# Altium PCB cpld.PcbDoc
Units mm, origin at the board's own origin, x right, y up, seen from the top; angles counter-clockwise.
Board outline 99 x 88 mm, 2 copper layers (Top Layer, Bottom Layer); 34 components, 48 nets, 164 pads, 0 vias.
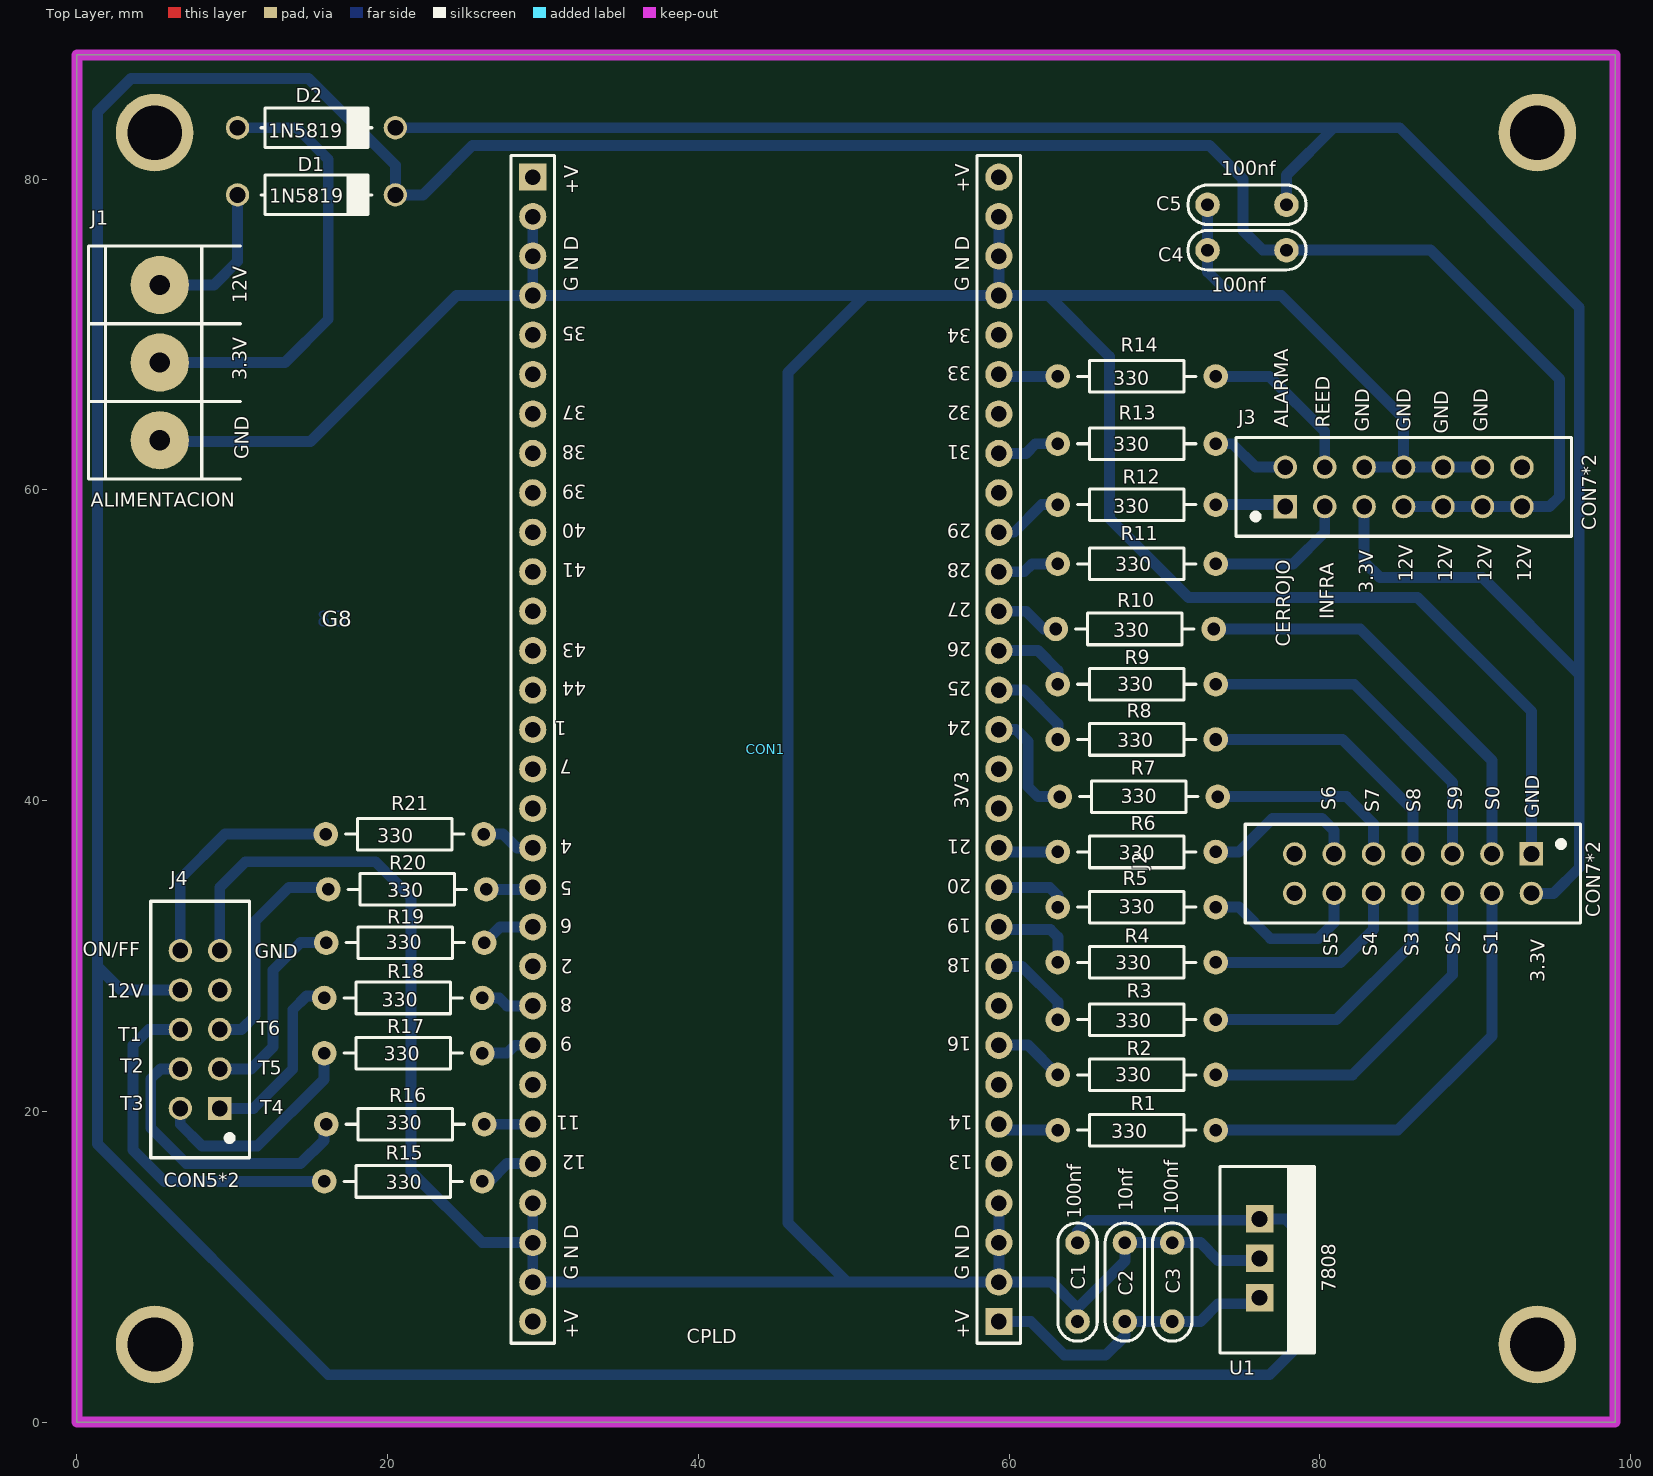
[diagram p0: Top Layer view]
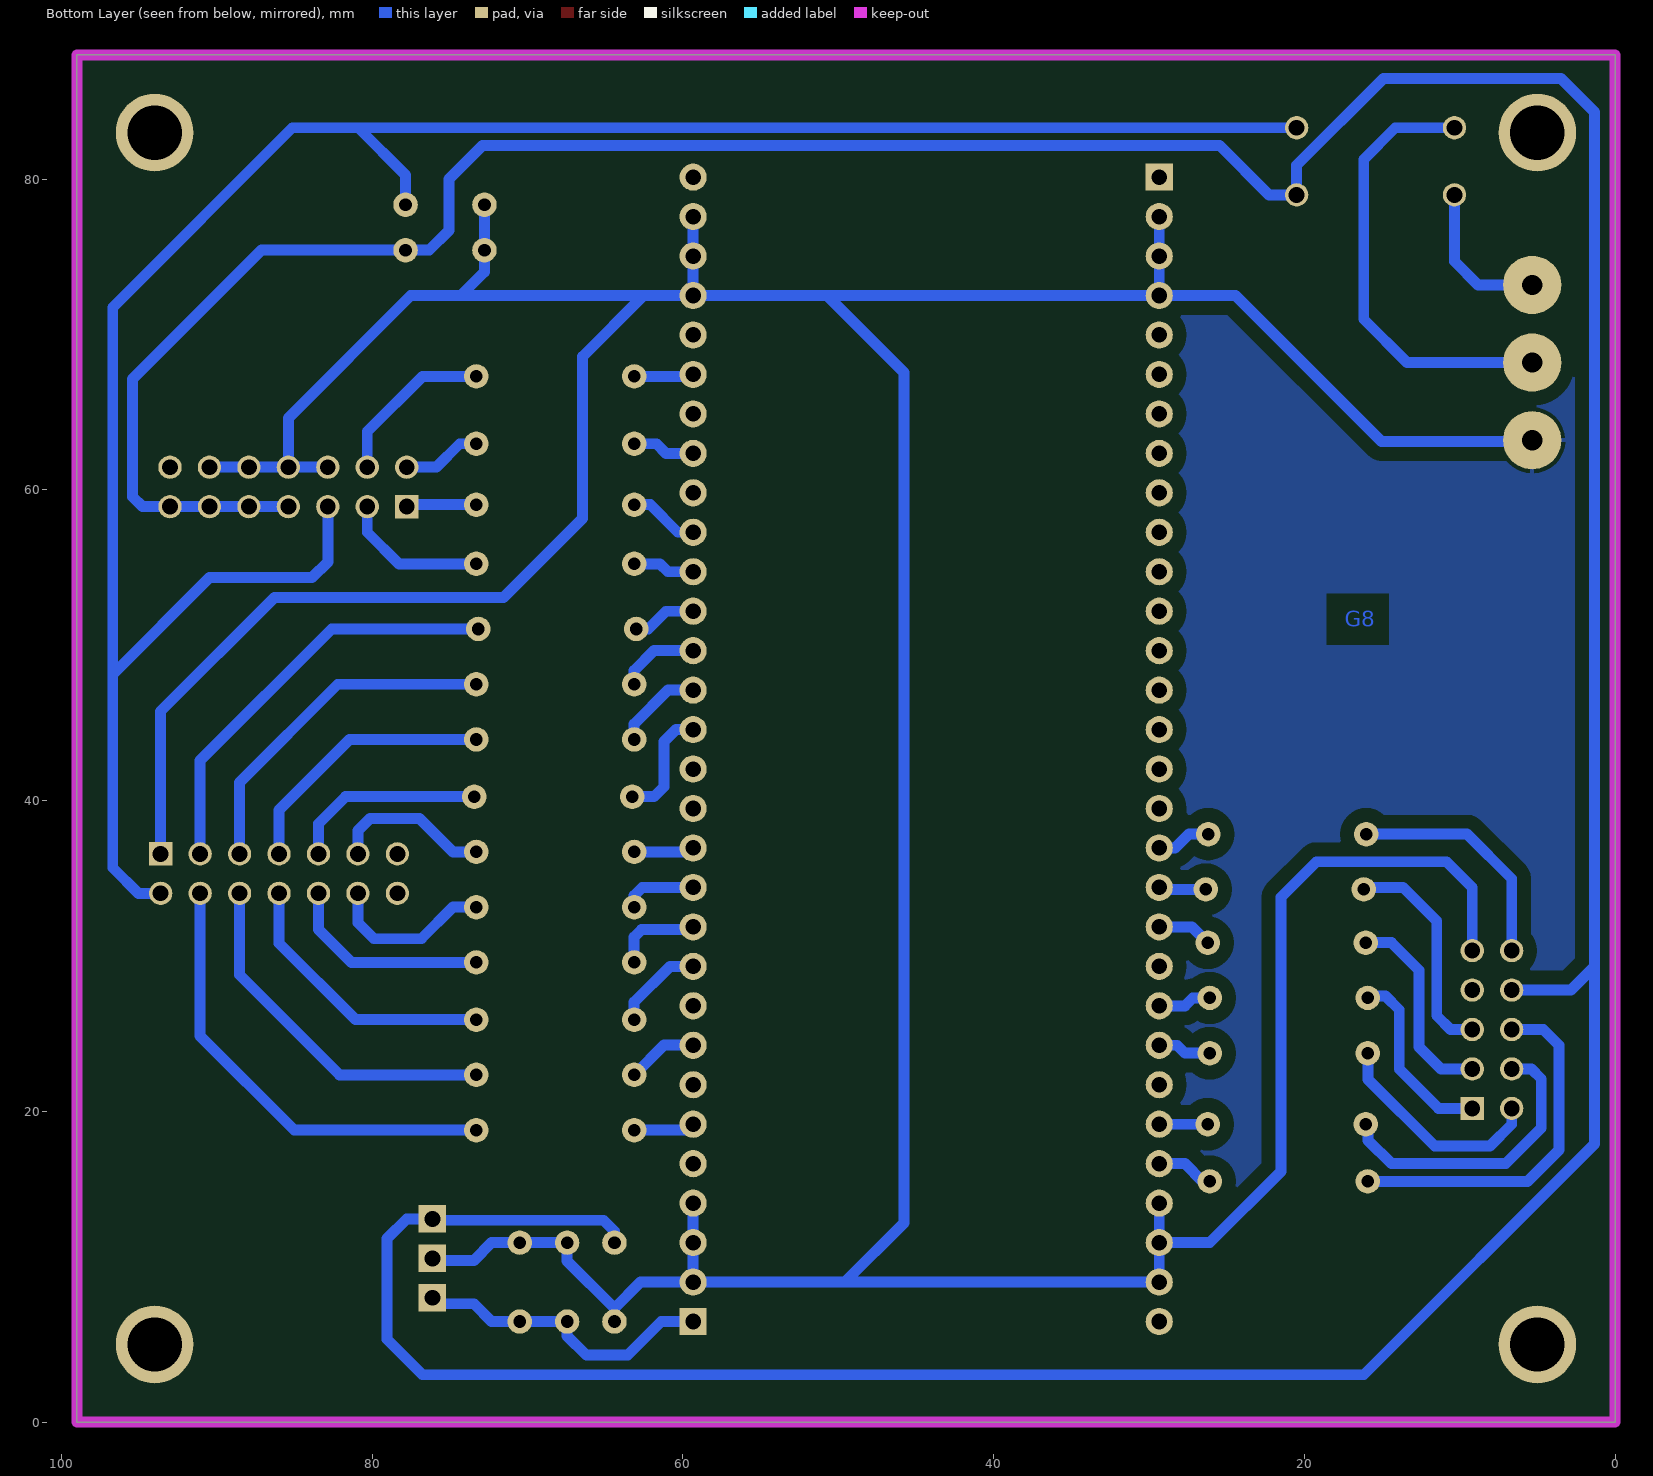
[diagram p1: Bottom Layer view, seen from below]

## Layer stack, top to bottom
Top Solder: solder mask 0.0102, Solder Resist, Dk 3.5
Top Layer: signal copper 0.0356
Dielectric1: dielectric 0.32, FR-4, Dk 4.8
Bottom Layer: signal copper 0.0356
Bottom Solder: solder mask 0.0102, Solder Resist, Dk 3.5

## Board outline
0,0 0,88 99,88 99,0

## Design rules (kind name [scope] priority, off if disabled: settings)
Clearance Clearance_1 [InPolygon] p1: gap=0.9
Clearance [All] p2: gap=0.3
PolygonConnect [All] p1: connectstyle=Relief reliefconductorwidth=0.254 reliefentries=4 polygonreliefangle="90 Angle" airgapwidth=0.254
RoutingLayers [All] p1: top layer_v5=FALSE bottom layer_v5=TRUE
RoutingVias [All] p1: holewidth=0.711 width=1.27 viastyle="Through Hole" minholewidth=0.711 minwidth=1.27 maxholewidth=0.711 maxwidth=1.27
SilkToSolderMaskClearance SilkscreenOverComponentPads [IsPad] p1: minsilkscreentomaskgap=0.254 clearancetoexposedcopper=TRUE
SolderMaskExpansion [All] p1: expansion=0.102
Width [All] p1: maxlimit=0.7 minlimit=0.254 preferedwidth=0.7 toplayer_maxwidth=0.254 toplayer_prefwidth=0.254 bottomlayer_minwidth=0.7 minimp=50.000000 maximp=50.000000 favimp=50.000000
28 further rules are at their usual default settings.

## Components (designator, comment, footprint, x,y, rotation, side; value= is the part's Value field where it differs from the comment)
C1 "100nf" CAP200 64.404,9.017 r270 top
C2 "10nf" CAP200 67.452,9.017 r90 top
C3 "100nf" CAP200 70.5,9.017 r90 top
C4 "100nf" CAP200 75.311,75.438 r180 top
C5 "100nf" CAP200 75.311,78.359 r180 top
CON1 "CPLD" CPLD_CON 44.338,43.307 r90 top
D1 "1N5819" DO41 15.415,78.994 r0 top
D2 "1N5819" DO41 15.415,83.312 r0 top
J1 "ALIMENTACION" BORNERA3 5.334,68.199 r0 top
J2 "CON7*2" SIP7*2 93.614,36.576 r180 top
J3 "CON7*2" SIP7*2 77.772,58.928 r0 top
J4 "CON5*2" SIP5*2 6.652,20.193 r90 top
R1 "330" RES400 73.294,18.796 r180 top
R2 "330" RES400 73.294,22.352 r180 top
R3 "330" RES400 73.294,25.908 r180 top
R4 "330" RES400 73.294,29.591 r180 top
R5 "330" RES400 73.294,33.147 r180 top
R6 "330" RES400 73.294,36.703 r180 top
R7 "330" RES400 73.421,40.259 r180 top
R8 "330" RES400 73.294,43.942 r180 top
R9 "330" RES400 73.294,47.498 r180 top
R10 "330" RES400 73.167,51.054 r180 top
R11 "330" RES400 73.294,55.245 r180 top
R12 "330" RES400 73.294,59.055 r180 top
R13 "330" RES400 73.294,62.974 r180 top
R14 "330" RES400 73.294,67.31 r180 top
R15 "330" RES400 26.083,15.494 r180 top
R16 "330" RES400 26.21,19.177 r180 top
R17 "330" RES400 26.083,23.749 r180 top
R18 "330" RES400 26.083,27.305 r180 top
R19 "330" RES400 26.21,30.861 r180 top
R20 "330" RES400 26.337,34.29 r180 top
R21 "330" RES400 26.177,37.846 r180 top
U1 "7808" "TO-220 V" 76.121,10.541 r270 top

## Footprints (in the part's own frame and the unit in brackets; to place one, negate y for a bottom-side part, rotate by r counter-clockwise, add the part's x,y. Pads: shape width x height; smd on the part's side, far side on the other; paste and mask are expansions set on the pad)
BORNERA3 [mm] "Bornera con Tornillos 5mm separación"
  round 3.75 hole 1.3: 1(0,5) 2(0,0) 3(0,-5)
  silkscreen extent -4.6,-7.5 5.2,7.5, body extent -3.76,-7.39 3.94,8.11, height 10.05
CAP200 [mil]
  round 62 hole 32: 1(-100,0) 2(100,0)
  silkscreen extent -150,-50 150,50, body extent -110,-46 110,44, height 246
CPLD_CON [mm] "Conector Para CI de Placa CPLD PIOIX"
  rect 1.75x1.75 hole 1: 1(-36.83,-15) 31(36.83,15)
  round 1.75 hole 1: 2(-34.29,-15) 3(-31.75,-15) 4(-29.21,-15) 5(-26.67,-15) 6(-24.13,-15) 7(-21.59,-15) 8(-19.05,-15) 9(-16.51,-15) 10(-13.97,-15) 11(-11.43,-15) 12(-8.89,-15) 13(-6.35,-15) 14(-3.81,-15) 15(-1.27,-15) 16(1.27,-15) 17(3.81,-15) 18(6.35,-15) 19(8.89,-15) 20(11.43,-15) 21(13.97,-15) 22(16.51,-15) 23(19.05,-15) 24(21.59,-15) 25(24.13,-15) 26(26.67,-15) 27(29.21,-15) 28(31.75,-15) 29(34.29,-15) 30(36.83,-15) 32(34.29,15) 33(31.75,15) 34(29.21,15) 35(26.67,15) 36(24.13,15) 37(21.59,15) 38(19.05,15) 39(16.51,15) 40(13.97,15) 41(11.43,15) 42(8.89,15) 43(6.35,15) 44(3.81,15) 45(1.27,15) 46(-1.27,15) 47(-3.81,15) 48(-6.35,15) 49(-8.89,15) 50(-11.43,15) 51(-13.97,15) 52(-16.51,15) 53(-19.05,15) 54(-21.59,15) 55(-24.13,15) 56(-26.67,15) 57(-29.21,15) 58(-31.75,15) 59(-34.29,15) 60(-36.83,15)
  silkscreen extent -38.23,-16.4 38.23,16.4, body extent -38.74,-17.19 38.73,17.19, height 16.3
DO41 [mm]
  round 1.5 hole 1.016: 1(-5.08,0) 2(5.08,0)
  silkscreen extent -3.56,-1.27 3.56,1.27, body extent -5.46,-1.19 5.46,1.37, height 2.03
RES400 [mil]
  round 62 hole 32: 1(0,0) 2(400,0)
  silkscreen extent 50,-40 350,40, body extent -12,-45 412,46, height 96
SIP5*2 [mm]
  rect 1.5x1.5 hole 1.016: 1(0,-2.54)
  round 1.5 hole 1.016: 2(0,0) 3(2.54,-2.54) 4(2.54,0) 5(5.08,-2.54) 6(5.08,0) 7(7.62,-2.54) 8(7.62,0) 9(10.16,-2.54) 10(10.16,0)
  silkscreen extent -3.17,-4.44 13.33,1.91, body extent -1.26,-3.84 11.44,1.24, height 10.1
SIP7*2 [mm]
  rect 1.5x1.5 hole 1.016: 1(0,0)
  round 1.5 hole 1.016: 2(0,2.54) 3(2.54,0) 4(2.54,2.54) 5(5.08,0) 6(5.08,2.54) 7(7.62,0) 8(7.62,2.54) 9(10.16,0) 10(10.16,2.54) 11(12.7,0) 12(12.7,2.54) 13(15.24,0) 14(15.24,2.54)
  silkscreen extent -3.18,-1.91 18.41,4.45, body extent -1.26,-1.3 16.52,3.78, height 10.1
"TO-220 V" [mil]
  rect 70x70 hole 40: 1(-100,0) 2(0,0) 3(100,0)
  silkscreen extent -232,-100 240,139, body extent -197,-79 197,118, height 709

## Part data
C1 C2 C3 C4 C5: library part CAP
CON1: library part CPLD_CON, "Conector para Placa PIO CPLD"
D1 D2: library part DIODO
J1: library part "BORNERA 3"
R1 R2 R3 R4 R5 R6 R7 R8 R9 R10 R11 R12 R13 R14 R15 R16 R17 R18 R19 R20 R21: library part RES
U1: library part 78XX, "REGULDOR POSITIVO"

## Free pads (board coordinates)
  round 5 hole 3.5: 0(5,5) 0(5,83) 0(94,83) 0(94,5)

## Nets (pads, with @x,y where several pads share a name; then routed paths per layer and width w, separated by ;. In a path a pad name is that pad's centre, name@x,y a point inside that pad or via, vN(x,y) a via of type N, cw(c..) or ccw(c..) an arc to the next point about the centre after c; other vN are vias at no path point)
3.3V: C5.1 D2.2 J2.2 J3.5 | length 147.2
  Bottom Layer w0.7: D2.2@20.749,83.312 80.899,83.312 ; C5.1 77.851,80.264 80.899,83.312 ; J3.5 82.852,55.372 83.868,54.356 90.472,54.356 96.695,48.133 ; J2.2 95.044,34.036 96.695,35.687 96.695,71.755 85.138,83.312 80.899,83.312
8V: C2.1 C3.1 CON1.1 U1.3 | length 19.6
  Bottom Layer w0.7: CON1.1 61.389,6.477 63.548,4.318 66.215,4.318 67.452,5.555 C2.1 C3.1 72.311,6.477 73.454,7.62 U1.3@76.088,7.62
12V: C1.1 C4.1 D1.2 J3.7 J3.9 J3.11 J3.13 J4.8 U1.1 | length 306.5
  Bottom Layer w0.7: J4.8 2.842,27.813 1.318,29.337 ; C1.1 64.404,12.286 65.112,12.994 75.794,12.994 U1.1@76.088,12.7 ; U1.1 77.772,13.081 79.042,11.811 79.042,5.334 76.756,3.048 16.177,3.048 1.318,17.907 1.318,29.337 ; J3.7 J3.9 J3.11 J3.13 94.79,58.928 95.425,59.563 95.425,67.135 87.122,75.438 C4.1 76.327,75.438 75.057,76.708 75.057,80.01 72.898,82.169 25.448,82.169 22.273,78.994 D1.2 20.495,80.899 14.907,86.487 3.477,86.487 1.318,84.328 1.318,29.337
ALARMA: J3.2 R13.1 | length 5.1
  Bottom Layer w0.7: R13.1 74.361,62.974 75.867,61.468 J3.2
CERROJO: J3.1 R12.1 | length 4.5
  Bottom Layer w0.7: R12.1 77.645,59.055 J3.1
GND: C1.2 C2.2 C3.2 C4.2 C5.2 CON1.2 CON1.3 CON1.4 CON1.27 CON1.28 CON1.29 CON1.32 CON1.33 CON1.34 CON1.57 CON1.58 CON1.59 J1.3 J2.1 J3.6 J3.8 J3.10 J3.12 J4.9 U1.2 | length 346.1
  Bottom Layer w0.7: J1.3@5.334,63.119 15.034,63.119 24.432,72.517 CON1.34 ; J4.9 9.192,34.417 10.843,36.068 19.225,36.068 21.511,33.782 21.511,16.129 26.083,11.557 CON1.58 ; CON1.57 CON1.58 ; CON1.32 CON1.33 CON1.34 ; CON1.4 CON1.3 CON1.2 ; CON1.29 CON1.28 CON1.27 ; C1.2 64.404,7.333 ; C5.2 C4.2 72.771,74.041 74.295,72.517 ; U1.2@76.088,10.16 75.834,10.414 73.454,10.414 72.311,11.557 C3.2 C2.2 67.452,10.381 64.404,7.333 ; J3.6 J3.8 ; J3.12 J3.10 J3.8 ; J2.1 93.614,45.753 86.281,53.086 71.549,53.086 66.469,58.166 66.469,68.58 62.532,72.517 ; CON1.58 CON1.59 49.578,9.017 ; CON1.34 50.721,72.517 ; 49.578,9.017 CON1.2 ; 49.578,9.017 45.768,12.827 45.768,67.564 50.721,72.517 ; 50.721,72.517 CON1.27 ; CON1.2 62.72,9.017 64.404,7.333 ; CON1.27 62.532,72.517 ; 62.532,72.517 74.295,72.517 ; 74.295,72.517 77.518,72.517 85.392,64.643 J3.8
INFRARROJO: J3.3 R11.1 | length 9.5
  Bottom Layer w0.7: R11.1 78.28,55.245 80.312,57.277 J3.3
NetCON1_6: CON1.6 R1.2 | length 4
  Bottom Layer w0.7: CON1.6 59.719,18.796 R1.2
NetCON1_8: CON1.8 R2.2 | length 4.6
  Bottom Layer w0.7: CON1.8 59.353,24.272 61.214,24.272 R2.2
NetCON1_10: CON1.10 R3.2 | length 5.9
  Bottom Layer w0.7: CON1.10 60.833,29.337 63.134,27.036 R3.2
NetCON1_11: CON1.11 R4.2 | length 5.7
  Bottom Layer w0.7: CON1.11 59.505,31.71 62.651,31.71 63.134,31.227 R4.2
NetCON1_12: CON1.12 R5.2 | length 4.8
  Bottom Layer w0.7: CON1.12 62.611,34.417 63.134,33.894 R5.2
NetCON1_13: CON1.13 R6.2 | length 3.5
  Bottom Layer w0.7: CON1.13@59.592,36.703 R6.2
NetCON1_16: CON1.16 R7.2 | length 7.4
  Bottom Layer w0.7: CON1.16 60.452,44.577 61.214,43.815 61.214,40.894 61.849,40.259 R7.2
NetCON1_17: CON1.17 R8.2 | length 5.7
  Bottom Layer w0.7: CON1.17 60.96,47.117 63.134,44.943 R8.2
NetCON1_18: CON1.18 R9.2 | length 5.2
  Bottom Layer w0.7: CON1.18 61.849,49.657 63.134,48.372 R9.2
NetCON1_19: CON1.19 R10.2 | length 4.1
  Bottom Layer w0.7: CON1.19 61.087,52.197 62.23,51.054 R10.2
NetCON1_20: CON1.20 R11.2 | length 4
  Bottom Layer w0.7: CON1.20 60.96,54.737 61.468,55.245 R11.2
NetCON1_21: CON1.21 R12.2 | length 4.5
  Bottom Layer w0.7: CON1.21 60.325,57.277 62.103,59.055 R12.2
NetCON1_23: CON1.23 R13.2 | length 4.1
  Bottom Layer w0.7: CON1.23 61.087,62.357 61.704,62.974 R13.2
NetCON1_25: CON1.25 R14.2 | length 3.7
  Bottom Layer w0.7: CON1.25@59.465,67.31 R14.2
NetCON1_48: CON1.48 R21.1 | length 3.5
  Bottom Layer w0.7: R21.1 27.432,37.846 28.321,36.957 CON1.48
NetCON1_49: CON1.49 R20.1 | length 3.1
  Bottom Layer w0.7: R20.1 29.211,34.29 CON1.49
NetCON1_50: CON1.50 R19.1 | length 3.5
  Bottom Layer w0.7: R19.1 27.226,31.877 CON1.50
NetCON1_52: CON1.52 R18.1 | length 3.5
  Bottom Layer w0.7: R18.1 27.178,27.305 27.686,26.797 CON1.52
NetCON1_53: CON1.53 R17.1 | length 3.5
  Bottom Layer w0.7: R17.1 27.686,23.749 28.194,24.257 CON1.53
NetCON1_55: CON1.55 R16.1 | length 3.1
  Bottom Layer w0.7: R16.1 CON1.55
NetCON1_56: CON1.56 R15.1 | length 3.7
  Bottom Layer w0.7: R15.1 26.543,15.494 27.686,16.637 CON1.56
NetD1_1: D1.1 J1.1 | length 9.9
  Bottom Layer w0.7: J1.1 8.81,73.199 10.335,74.724 D1.1
NetD2_1: D2.1 J1.2 | length 29
  Bottom Layer w0.7: J1.2 13.383,68.199 16.177,70.993 16.177,81.28 14.145,83.312 D2.1
ON/OFF: J4.10 R21.2 | length 15.2
  Bottom Layer w0.7: J4.10 6.652,34.973 9.525,37.846 R21.2
"REED SWITCH": J3.4 R14.1 | length 10.8
  Bottom Layer w0.7: R14.1 76.756,67.31 80.312,63.754 J3.4
S0: J2.3 R10.1 | length 27.4
  Bottom Layer w0.7: R10.1 82.598,51.054 91.074,42.578 J2.3
S1: J2.4 R1.1 | length 29.5
  Bottom Layer w0.7: R1.1 85.011,18.796 91.074,24.859 J2.4
S2: J2.6 R2.1 | length 23.1
  Bottom Layer w0.7: R2.1 82.09,22.352 88.534,28.796 J2.6
S3: J2.8 R3.1 | length 17.9
  Bottom Layer w0.7: R3.1 81.074,25.908 85.994,30.828 J2.8
S4: J2.10 R4.1 | length 13.4
  Bottom Layer w0.7: R4.1 81.328,29.591 83.454,31.717 J2.10
S5: J2.12 R5.1 | length 10.8
  Bottom Layer w0.7: R5.1 74.803,33.147 76.835,31.115 79.883,31.115 80.914,32.146 J2.12
S6: J2.11 R6.1 | length 10.3
  Bottom Layer w0.7: R6.1 74.803,36.703 76.962,38.862 80.137,38.862 80.914,38.085 J2.11
S7: J2.9 R7.1 | length 12.7
  Bottom Layer w0.7: R7.1 81.709,40.259 83.454,38.514 J2.9
S8: J2.7 R8.1 | length 17.4
  Bottom Layer w0.7: R8.1 81.455,43.942 85.994,39.403 J2.7
S9: J2.5 R9.1 | length 22.5
  Bottom Layer w0.7: R9.1 82.217,47.498 88.534,41.181 J2.5
T1: J4.6 R15.2 | length 23.3
  Bottom Layer w0.7: J4.6 4.62,25.273 3.604,24.257 3.604,17.526 5.636,15.494 R15.2@15.89,15.494
T2: J4.4 R16.2 | length 19.2
  Bottom Layer w0.7: J4.4 5.382,22.733 4.747,22.098 4.747,18.923 7.033,16.637 14.399,16.637 15.89,18.128 R16.2@15.89,19.286
T3: J4.2 R17.2 | length 14.3
  Bottom Layer w0.7: J4.2 6.652,19.177 8.049,17.78 11.605,17.78 15.89,22.065 R17.2@15.89,23.749
T4: J4.1 R18.2 | length 11.9
  Bottom Layer w0.7: J4.1 11.351,20.193 13.891,22.733 13.891,26.543 14.78,27.432 R18.2@15.89,27.432
T5: J4.3 R19.2 | length 13.1
  Bottom Layer w0.7: J4.3 11.207,22.733 12.621,24.147 12.621,29.083 14.399,30.861 R19.2@16.017,30.861
T6: J4.5 R20.2 | length 14.3
  Bottom Layer w0.7: J4.5 10.589,25.273 11.478,26.162 11.478,32.258 13.637,34.417 R20.2@16.144,34.417
pads on no net: CON1.5 CON1.7 CON1.9 CON1.14 CON1.15 CON1.22 CON1.24 CON1.26 CON1.30 CON1.31 CON1.35 CON1.36 CON1.37 CON1.38 CON1.39 CON1.40 CON1.41 CON1.42 CON1.43 CON1.44 CON1.45 CON1.46 CON1.47 CON1.51 CON1.54 CON1.60 J2.13 J2.14 J3.14 J4.7

## Polygon pours and split planes (outlines as drawn)
GND on Bottom Layer "polygon1" (solid, remove dead copper, pour order 5): 102.489,-3.302 -0.508,-3.302 -2.032,-1.778 -1.651,-1.397 -1.651,91.821 101.6,91.821 102.743,90.678

## Keep-outs
Keep-Out Layer:
  the board outline again, w0.7

## Other copper
Bottom Layer:
  text "G8" at 17.399,51.181 h1

## Silkscreen, mask and mechanical layers (free items; w line width, h text height)
Top Overlay:
  text "12V" at 10.922,72.009 h0.9 r90
  text "3.3V" at 10.922,67.056 h0.9 r90
  text "ALARMA" at 77.978,64.008 h0.9 r90
  text "REED" at 80.645,64.008 h0.9 r90
  text "GND" at 83.185,63.754 h0.9 r90
  text "GND" at 85.852,63.754 h0.9 r90
  text "GND" at 90.805,63.754 h0.9 r90
  text "GND" at 88.265,63.627 h0.9 r90
  text "GND" at 11.049,61.976 h0.9 r90
  text "12V" at 85.979,54.102 h0.9 r90
  text "12V" at 88.519,54.102 h0.9 r90
  text "12V" at 91.059,54.102 h0.9 r90
  text "12V" at 93.599,54.102 h0.9 r90
  text "3.3V" at 83.439,53.34 h0.9 r90
  text "INFRA" at 80.899,51.689 h0.9 r90
  text "G8" at 15.748,51.181 h1
  text "CERROJO" at 78.105,49.911 h0.9 r90
  text "S6" at 81.026,39.37 h0.9 r90
  text "S9" at 89.154,39.37 h0.9 r90
  text "S0" at 91.567,39.37 h0.9 r90
  text "S7" at 83.82,39.243 h0.9 r90
  text "S8" at 86.487,39.243 h0.9 r90
  text "GND" at 94.107,38.862 h0.9 r90
  text "S2" at 89.027,30.099 h0.9 r90
  text "S1" at 91.44,30.099 h0.9 r90
  text "ON/FF" at 0.381,29.972 h0.9
  text "S5" at 81.153,29.972 h0.9 r90
  text "S4" at 83.693,29.972 h0.9 r90
  text "S3" at 86.36,29.972 h0.9 r90
  text "GND" at 11.43,29.845 h0.9
  text "3.3V" at 94.488,28.321 h0.9 r90
  text "12V" at 1.905,27.305 h0.9
  text "T6" at 11.557,24.892 h0.9
  text "T1" at 2.667,24.511 h0.9
  text "T2" at 2.794,22.479 h0.9
  text "T5" at 11.684,22.352 h0.9
  text "T3" at 2.794,20.066 h0.9
  text "T4" at 11.811,19.812 h0.9

## Text inside footprints (layer, text, board x,y; h text height)
CON1: Top Overlay "43" at 32.781,50.15 h0.9 r180; Top Overlay "+V" at 32.273,5.359 h0.9 r90; Top Overlay "+V" at 57.419,5.359 h0.9 r90; Top Overlay "+V" at 57.419,79.146 h0.9 r90; Top Overlay "+V" at 32.273,79.019 h0.9 r90; Top Overlay "G N D" at 32.273,72.796 h0.9 r90; Top Overlay "G N D" at 32.273,9.169 h0.9 r90; Top Overlay "G N D" at 57.419,9.169 h0.9 r90; Top Overlay "G N D" at 57.419,72.796 h0.9 r90; Top Overlay "34" at 57.546,70.383 h0.9 r180; Top Overlay "33" at 57.546,67.97 h0.9 r180; Top Overlay "32" at 57.546,65.43 h0.9 r180; Top Overlay "31" at 57.546,62.89 h0.9 r180; Top Overlay "29" at 57.546,57.81 h0.9 r180; Top Overlay "28" at 57.546,55.27 h0.9 r180; Top Overlay "27" at 57.546,52.73 h0.9 r180; Top Overlay "26" at 57.546,50.19 h0.9 r180; Top Overlay "25" at 57.546,47.65 h0.9 r180; Top Overlay "24" at 57.546,45.11 h0.9 r180; Top Overlay "21" at 57.546,37.49 h0.9 r180; Top Overlay "20" at 57.546,34.95 h0.9 r180; Top Overlay "19" at 57.546,32.41 h0.9 r180; Top Overlay "18" at 57.546,29.87 h0.9 r180; Top Overlay "16" at 57.546,24.79 h0.9 r180; Top Overlay "14" at 57.646,19.71 h0.9 r180; Top Overlay "13" at 57.646,17.17 h0.9 r180; Top Overlay "11" at 32.4,19.71 h0.9 r180; Top Overlay "9" at 31.892,24.79 h0.9 r180; Top Overlay "8" at 31.892,27.33 h0.9 r180; Top Overlay "7" at 31.863,42.647 h0.9 r180; Top Overlay "6" at 31.892,32.41 h0.9 r180; Top Overlay "5" at 31.892,34.823 h0.9 r180; Top Overlay "4" at 31.892,37.49 h0.9 r180; Top Overlay "2" at 31.913,29.797 h0.9 r180; Top Overlay "1" at 31.511,45.11 h0.9 r180; Top Overlay "44" at 32.781,47.65 h0.9 r180; Top Overlay "41" at 32.781,55.27 h0.9 r180; Top Overlay "40" at 32.781,57.81 h0.9 r180; Top Overlay "39" at 32.781,60.35 h0.9 r180; Top Overlay "38" at 32.781,62.89 h0.9 r180; Top Overlay "37" at 32.781,65.43 h0.9 r180; Top Overlay "35" at 32.781,70.51 h0.9 r180; Top Overlay "12" at 32.781,17.17 h0.9 r180; Top Overlay "3V3" at 57.413,39.482 h0.9 r90